# Altium PCB back4_STM32F405.PcbDoc (part 3 of 3)
Units mil, origin at the board's own origin, x right, y up, seen from the top; angles counter-clockwise.
Board outline 3543.31 x 3543.31 mil, 4 copper layers (Top Layer, GND02, PWR03, Bottom Layer), stack 32.024 mil thick; 190 components, 150 nets, 1254 pads, 137 vias.
Unrouted connection lines stored in the file: 499.
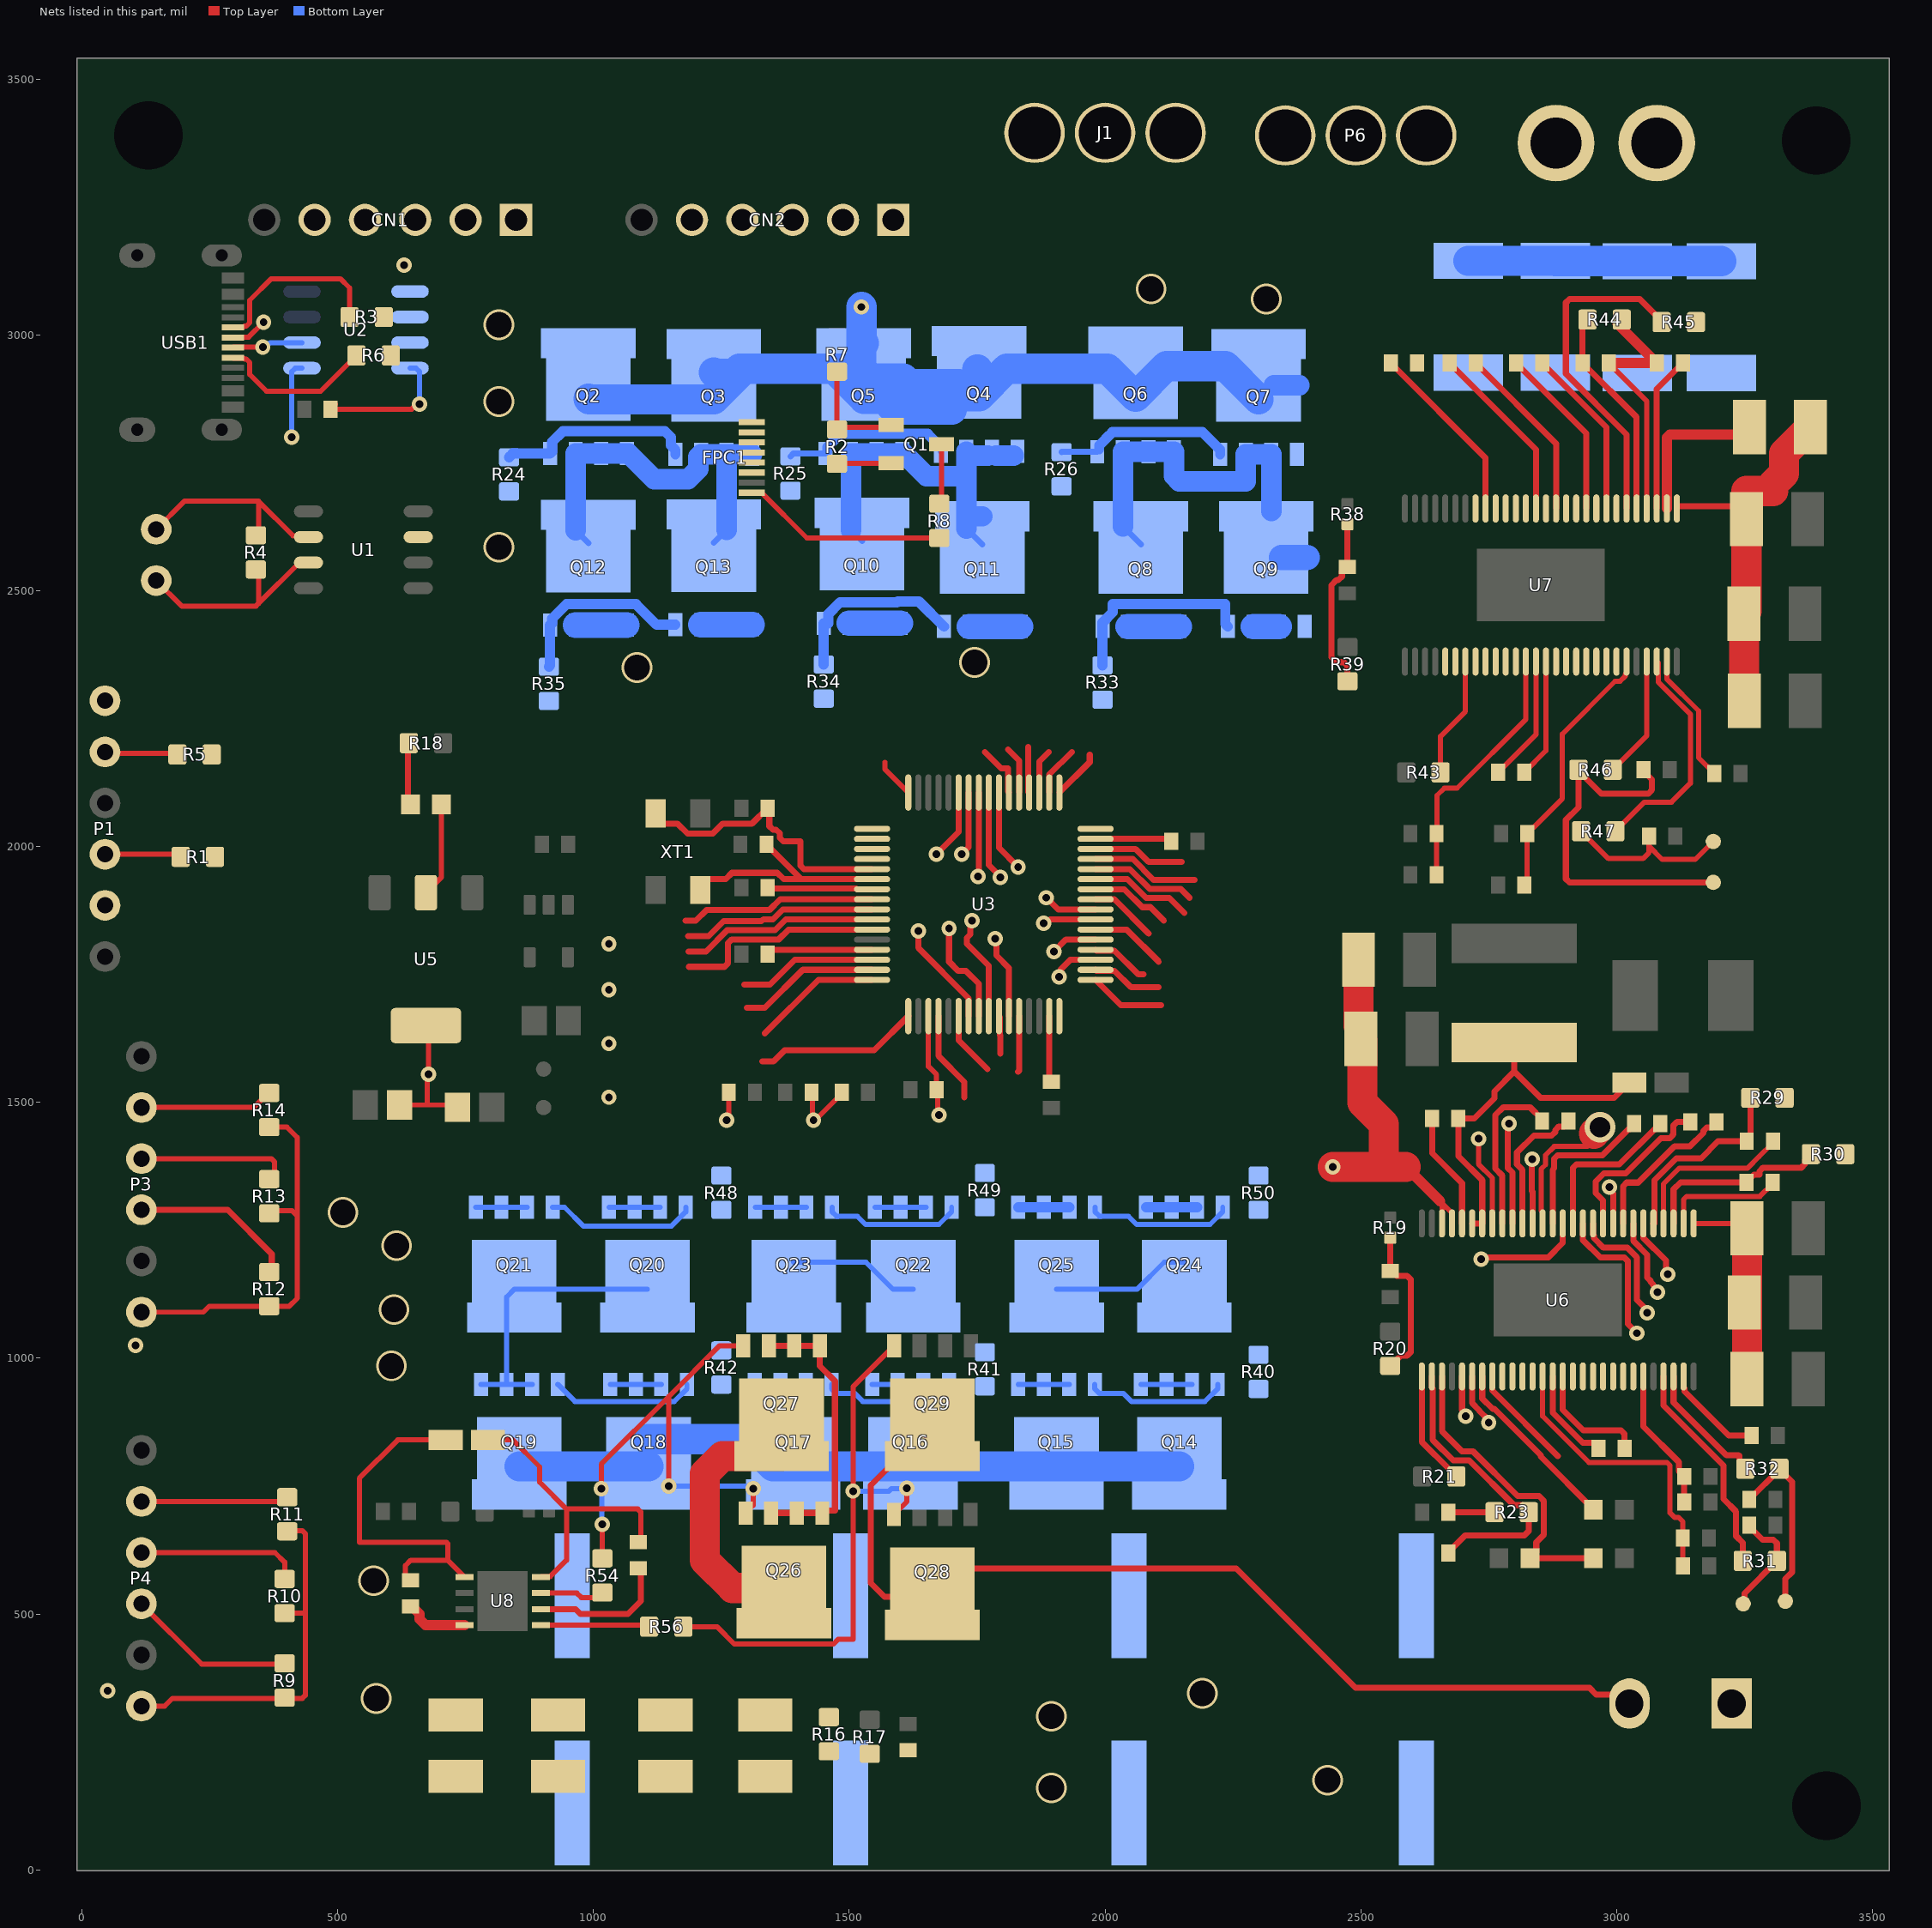
[diagram p4: the nets of this part, all layers, seen from the top]

## Via types
v1: diameter 30, hole 15, Top Layer to Bottom Layer, 76 vias
v2: diameter 27.56, hole 11.81, Top Layer to Bottom Layer, 42 vias
v3: diameter 60, hole 50, Top Layer to Bottom Layer, 18 vias
v4: diameter 60, hole 40, Top Layer to Bottom Layer, 1 vias

## Nets (pads, with @x,y where several pads share a name; then routed paths per layer and width w, separated by ;. In a path a pad name is that pad's centre, name@x,y a point inside that pad or via, vN(x,y) a via of type N, cw(c..) or ccw(c..) an arc to the next point about the centre after c; other vN are vias at no path point) (continued)
DCBUS: C12.1 C13.1 C14.1 C15.1 C16.1 C17.2 C18.2 C19.2 C28.2 C29.2 C42.2 C44.2 C47.2 C49.2 C60.2 C62.2 C65.2 P5.1 Q2.D Q3.D Q4.D Q5.D Q6.D Q7.D Q14.D Q15.D Q16.D Q17.D Q18.D Q19.D Q26.D Q27.D R16.2 U6.29 U6.53 U6.54 U7.29 | length 5779.9
  Top Layer w10: U6.54@2658.53,1263.45 2658.53,1303.15 2678.21,1283.47 U6.53@2678.21,1263.45 ; U6.29@3150.65,1263.45 3245.3,1263.45 C47.2@3254.91,1253.84
  Top Layer w12: U7.29@3118.93,2665.01 3228.93,2665.01 C62.2@3253.93,2640.01
  Top Layer w20: 2587.84,1373.84 2654.67,1307.01
  Top Layer w59.06: Q27.D@1367.48,808.79 Q27.D@1312.36,808.79 ; Q27.D@1367.48,863.91 Q27.D@1312.36,808.79 ; Q26.D@1372.2,537.1 1358.42,550.88 1271.57,550.88 1217.2,605.25 1217.2,774.2 1251.8,808.79 Q27.D@1312.36,808.79 ; v1(2444.91,1373.84) 2544.91,1373.84 ; C29.2@2495.43,1778.84 2495.43,1649.55 2497.51,1647.46 2497.51,1626.5 C28.2@2500.17,1623.84 2502.83,1621.19 2502.83,1499.44 2544.91,1457.36 2544.91,1373.84 ; 2587.84,1373.84 2544.91,1373.84 ; C65.2@3249.45,2285.01 3249.45,2454.49 C60.2@3248.93,2455.01 3253.93,2460.01 C62.2@3253.93,2640.01 3253.93,2695.01 3305.69,2695.01 3305.69,2707.88 3327.16,2729.34 3327.16,2768.24 C49.2@3378.93,2820.01 ; C42.2@3254.91,958.84 3254.91,1103.84 C44.2@3249.91,1108.84 3254.91,1113.84 C47.2@3254.91,1253.84
  Bottom Layer w59.06: Q19.D@855,788.54 Q18.D@1107.66,788.54 ; Q2.D@990,2875.36 991.54,2873.82 Q3.D@1235,2873.82 1285.28,2924.1 1237.87,2924.1 Q3.D@1235,2926.97 ; Q18.D@1107.66,841.69 1297.76,841.69 1350.91,788.54 Q17.D@1390.28,788.54 Q16.D@1619.72,788.54 Q15.D@1905,788.54 Q14.D@2145,788.54 ; Q3.D@1285.28,2934.1 Q5.D@1469.59,2934.1 ; Q5.D@1523.61,2928.51 1523.61,2983.62 Q5.D@1523.78,2983.62 ; v1(1523.78,3054.73) Q5.D@1523.78,2983.62 ; Q5.D@1526.06,2983.62 Q5.D@1523.78,2983.62 ; Q5.D@1528.33,2983.62 Q5.D@1523.78,2983.62 ; Q4.D@1714.41,2904.1 1616.08,2904.1 1605.45,2914.73 1542.11,2914.73 Q5.D@1528.33,2928.51 1522.74,2934.1 Q5.D@1469.59,2934.1 ; Q4.D@1750,2904.1 1750,2932.17 Q4.D@1750.71,2932.88 ; Q7.D@2300,2874.1 2235,2939.1 2120,2939.1 Q6.D@2059.73,2878.82 2004.45,2934.1 1808.15,2934.1 Q4.D@1753.78,2879.73 1714.41,2879.73 1700.63,2865.95 1700.63,2854.04 1589.02,2854.04 1567.7,2875.36 Q5.D@1528.33,2875.36 Q5.D@1469.59,2934.1
  other v3: 570,565 605,985 610,1095 615,1220 510,1285 815,2870 815,3020 2315,3070 2090,3090
EN_GATE_1: U3.33 U6.16 U7.16 | length 149
  Top Layer w11.81: U3.33@1981.44,1739.42 2030.87,1690 2110,1690
FAULT_1: U3.54 U6.6 U7.6 | length 210.5
  Top Layer w11.81: 1765,2185 1797.1,2152.9 1810.28,2152.9 1810.28,2107.44 U3.54@1812.15,2105.56 ; U6.6@2717.58,964.24 2717.58,912.27 2732.03,897.82 2732.03,896.65 2749.91,878.77 v1(2749.91,873.84)
GH_A_2: R24.2 U6.47 | length 200.1
  Top Layer w11.81: v1(2789.91,1458.84) 2787.44,1456.38 2787.44,1371.66 2796.32,1362.77 U6.47@2796.32,1263.45
GH_A_3: R40.2 U7.47
GH_B_2: R25.2 U6.42 | length 211.1
  Top Layer w11.81: v1(2734.91,1193.84) 2737.88,1196.81 2866.47,1196.81 2894.75,1225.09 U6.42@2894.75,1263.45
GH_B_3: R41.2 U7.42
GH_C_2: R26.2 U6.37 | length 73.7
  Top Layer w11.81: v1(2985.95,1334.13) 2985.95,1329.2 2993.17,1321.99 U6.37@2993.17,1263.45
GH_C_3: R42.2 U7.37
GL_A_2: R35.2 U6.45 | length 126.6
  Top Layer w11.81: v1(2834.91,1388.84) 2833.82,1387.76 2833.82,1327.18 2835.69,1325.31 U6.45@2835.69,1263.45
GL_A_3: R50.2 U7.45
GL_B_2: R34.2 U6.40 | length 285.8
  Top Layer w11.81: U6.40@2934.12,1263.45 2934.12,1230.79 2968.1,1196.81 3014.84,1196.81 3021.81,1189.84 3021.81,1066.94 v1(3039.91,1048.84)
GL_B_3: R49.2 U7.40
GL_C_2: R33.2 U6.35 | length 154.2
  Top Layer w11.81: U6.35@3032.54,1263.45 3032.54,1229.48 3059.91,1202.12 3059.91,1157.7 3066.43,1151.18 3066.43,1149.27 3071.43,1144.27 3071.43,1142.25 3079.91,1133.77 v1(3079.91,1128.84)
GL_C_3: R48.2 U7.35
GPIO0_1: SW2.1 U3.28 | length 109.3
  Top Layer w11.81: 1830,1560 1831.83,1561.83 U3.28@1831.83,1668.56
GVDD: C34.2 C35.2 C52.2 C53.2 U6.13 U7.13 | length 1085.1
  Top Layer w10: C53.2@2647.98,1945.01 C52.2@2647.98,2025.01 ; C52.2@2648.93,2025.01 2648.93,2100.01 2663.24,2114.33 2688.24,2114.33 2822.55,2248.63 U7.13@2822.55,2361.57 ; U6.13@2855.38,964.24 2855.38,886.71 2945.98,796.11 3098.68,796.11 3104.54,790.25 3104.54,747.55 3104.54,697.55 3113.03,689.06 3120.83,689.06 3129.32,680.57 C34.2@3129.32,648.84 3129.61,648.55 3129.61,603.55 3124.91,598.85 C35.2@3129.91,593.84
LEDA_1: FPC1.1 R8.1 | length 403.7
  Top Layer w10: FPC1.1@1308.97,2691.63 1309.88,2690.73 1329.56,2690.73 1417.12,2603.17 1583.17,2603.17 R8.1@1676.02,2603.17
M0_AH_1: U3.41 U6.17 | length 131.3
  Top Layer w11.81: U3.41@1981.44,1896.9 2018.1,1896.9 2085,1830
M0_AL_1: U3.34 U6.18 | length 137.7
  Top Layer w11.81: U3.34@1981.44,1759.11 1983.32,1757.24 2018.35,1757.24 2050.58,1725 2105,1725
M0_BH_1: U3.42 U6.19 | length 159.1
  Top Layer w11.81: U3.42@1981.44,1916.59 2037.66,1916.59 2072.68,1881.57 2088.43,1881.57 2115,1855
M0_BL_1: U3.35 U6.20 | length 92.2
  Top Layer w11.81: v1(1910,1745) 1913.48,1748.48 1913.48,1760.04 1932.23,1778.79 U3.35@1981.44,1778.79
M0_CH_1: U3.43 U6.21 | length 201
  Top Layer w11.81: U3.43@1981.44,1936.27 2043.16,1936.27 2080.06,1899.38 2125.62,1899.38 2155,1870
M0_CL_1: U3.36 U6.22 | length 113.6
  Top Layer w11.81: U3.36@1981.44,1798.48 1983.32,1796.6 2018.35,1796.6 2064.95,1750 2075,1750
M0_ENC_A_1: P4.3 R9.1 U3.56 | length 504.3
  Top Layer w10: P4.3@116.12,520 234.19,401.93 394.58,401.93 R9.1@396.12,403.46
  Top Layer w11.81: U3.56@1772.78,2105.56 1772.78,1964.05 1795,1941.82 v1(1795,1940)
M0_ENC_B_1: P4.4 R10.1 U3.57 | length 487.4
  Top Layer w10: P4.4@116.12,620 377.3,620 396.12,601.18 R10.1@396.12,568.46
  Top Layer w11.81: v1@1750,1940 v1(1751.55,1941.55) 1753.1,1943.1 U3.57@1753.1,2105.56
M0_ENC_Z_1: P4.5 R11.1 U3.40 | length 394.4
  Top Layer w10: P4.5@116.12,720 392.65,720 R11.1@401.12,728.46
  Top Layer w11.81: v1(1885,1900) 1885.7,1900 1908.49,1877.22 U3.40@1981.44,1877.22
M0_nCS_1: U3.2 U6.8 | length 208.4
  Top Layer w11.81: U6.8@2756.95,964.24 2756.95,936.8 2884.91,808.84
M0_SO1_1: C45.2 R31.2 TP3.1 U3.8 | length 597.9
  Top Layer w11.81: 1180,1855 1200,1855 1220.73,1875.73 1343.67,1875.73 1364.84,1896.9 U3.8@1544.43,1896.9 ; TP3.1@3247.39,520.01 3249.91,522.53 3249.91,540.38 R31.2@3313.37,603.84 3313.37,638.29 3306.45,645.2 3285,645.2 3259.32,670.89 C45.2@3259.32,673.84
M0_SO2_1: C46.2 R32.2 TP4.1 U3.9 | length 738.1
  Top Layer w11.81: 1185,1825 1224.81,1825 1254.07,1854.26 1328.29,1854.26 1331.95,1857.92 1351.05,1857.92 1370.35,1877.22 U3.9@1544.43,1877.22 ; C46.2@3259.32,723.84 3318.37,782.9 3342.99,758.28 3342.99,581.82 3329.91,568.74 TP4.1@3329.91,525.01
M0_TEMP_1: C25.2 C48.2 R19.1 R20.2 R38.1 R39.2 | length 651.4
  Top Layer w11.81: R39.2@2473.93,2323.08 2473.93,2353.47 2467.01,2360.39 2451.9,2360.39 2442.34,2369.96 2442.34,2510.77 2452.26,2520.7 2456.18,2520.7 2463.1,2527.62 2463.1,2538.32 2470.97,2546.19 C48.2@2473.93,2546.19 R38.1@2473.93,2630.01 ; R20.2@2557.39,985.01 2559.36,985.01 2571.17,996.82 2571.17,998.09 2578.09,1005.01 2590.47,1005.01 2597.39,1011.93 2597.39,1153.68 2590.47,1160.6 2570.34,1160.6 2560.34,1170.6 C25.2@2557.39,1170.6 R19.1@2557.39,1235.33
M0_TEMP（ENC_CS0）_1: CN1.5 U3.25 | length 208.3
  Top Layer w11.81: v1(1740,1855) 1736.52,1851.52 1736.52,1828.33 1730,1821.81 1730,1810 1772.78,1767.22 U3.25@1772.78,1668.56
M1_AH_1: U3.37 U7.17 | length 91
  Top Layer w11.81: v1(1900,1795) 1923.16,1818.16 U3.37@1981.44,1818.16
M1_AL_1: U3.23 U7.18 | length 207.2
  Top Layer w11.81: v1(1635,1835) 1635,1802 1733.41,1703.59 U3.23@1733.41,1668.56
M1_BH_1: U3.38 U7.19 | length 149.6
  Top Layer w11.81: U3.38@1981.44,1837.85 2042.15,1837.85 2105,1775
M1_BL_1: U3.26 U7.20 | length 75
  Top Layer w11.81: U3.26@1792.47,1668.56 1794.34,1666.69 1794.34,1630.99 1795,1630.99 1795,1595
M1_CH_1: U3.39 U7.21 | length 104.6
  Top Layer w11.81: v1(1880,1850) 1884.92,1850 1892.46,1857.54 U3.39@1981.44,1857.54
M1_CL_1: U3.27 U7.22 | length 162.7
  Top Layer w11.81: v1(1785,1820) 1787.37,1817.63 1787.37,1787.28 1812.15,1762.5 U3.27@1812.15,1668.56
M1_ENC_A_1: P3.3 R12.1 U3.58 | length 454
  Top Layer w11.81: P3.3@116.12,1290 284.82,1290 370.92,1203.9 370.92,1173.27 R12.1@366.12,1168.46 ; v1(1720,1985) 1733.41,1998.41 U3.58@1733.41,2105.56
M1_ENC_B_1: P3.4 R13.1 U3.59 | length 439.4
  Top Layer w10: P3.4@116.12,1390 370.26,1390 376.12,1384.14 376.12,1360 R13.1@366.12,1350
  Top Layer w11.81: v1(1670,1985) 1713.73,2028.73 U3.59@1713.73,2105.56
M1_ENC_Z_1: P3.5 R14.1 U3.4 | length 261.8
  Top Layer w10: P3.5@116.12,1490 335.69,1490 364.15,1518.46 R14.1@366.12,1518.46
M1_nCS_1: U3.3 U7.8
M1_SO1_1: C63.2 R46.2 TP5.1 U3.11 | length 1136.3
  Top Layer w11.81: 1186.68,1765 1256.18,1765 1263.09,1771.92 1263.09,1811.62 1263.13,1811.66 1270.11,1818.64 1362.14,1818.64 1381.35,1837.85 U3.11@1544.43,1837.85 ; R46.2@2925.46,2150.01 R46.2@2925.46,2148.04 ; C63.2@3052.75,2150.01 3052.75,2147.06 3068.93,2130.88 3068.93,2110.56 3062.01,2103.64 2969.86,2103.64 R46.2@2925.46,2148.04 ; TP5.1@3188.93,1930.01 2907.76,1930.01 2900.84,1936.93 2900.84,2052.03 2925.46,2076.66 R46.2@2925.46,2148.04
M1_SO2_1: C64.2 R47.2 TP6.1 U3.10 | length 727.5
  Top Layer w10: R47.2@2930.46,2030.01 2984.04,1976.43 3051.49,1976.43 3063.33,1988.28 3063.33,2000.6 ; C64.2@3063.33,2020.01 3063.33,2000.6 ; TP6.1@3188.93,2010.01 3153.93,1975.01 3088.93,1975.01 3063.33,2000.6
  Top Layer w11.81: 1185.22,1795 1220,1795 1261.45,1836.45 1354.76,1836.45 1375.85,1857.53 U3.10@1544.43,1857.53
M1_TEMP（ENC_CS1）_1: CN2.5 U3.20 | length 179.5
  Top Layer w11.81: U3.20@1674.36,1668.56 1674.36,1590.64 1725,1540 1725,1510
NetC1_2: C1.2 U2.8 | length 277.4
  Top Layer w10: C1.2@495.59,2865 C1.2@485.59,2855 644.59,2855 654.59,2865 v1(660,2865)
  Bottom Layer w10: U2.8@641.22,2935 653.12,2935 659.96,2928.16 v1(660,2865) v1(660,2865)
NetC2_1: C2.1 U3.5 XT1.3 | length 563.7
  Top Layer w11.81: XT1.3@1121.69,2064.8 1121.69,2058.78 1135.47,2045 1164.03,2045 1183.69,2025.34 1232.92,2025.34 1252.58,2045 1310,2045 C2.1@1340,2075 1343.64,2071.36 1343.64,2040 1350.56,2033.08 1356.91,2033.08 1364.03,2025.96 1364.03,2017.12 1371.14,2010 1404.45,2010 1404.45,1962.88 1411.37,1955.96 U3.5@1544.43,1955.96
NetC3_1: C3.1 U3.6 XT1.1 | length 461
  Top Layer w11.81: XT1.1@1208.31,1915.2 1208.31,1936.27 1258.34,1936.27 1270.7,1948.64 1359.3,1948.64 1371.66,1936.27 U3.6@1544.43,1936.27 ; C3.1@1338.2,2004.44 1338.2,2003.94 1403.99,1938.15
NetC4_2: C4.2 U3.47 | length 150.5
  Top Layer w11.81: U3.47@1981.44,2015.01 2050.69,2015.01 2051.26,2015.59 2123.82,2015.59 C4.2@2129.41,2010
NetC5_2: C5.2 U3.31 | length 129.7
  Top Layer w11.81: U3.31@1890.89,1668.56 1890.89,1544.7 C5.2@1895,1540.59
NetC11_2: C11.2 U3.13 | length 208.3
  Top Layer w11.81: C11.2@1340,1790 1340,1790.61 1347.87,1798.48 U3.13@1544.43,1798.48
NetC26_1: C26.1 R23.1 | length 90.4
  Top Layer w11.81: C26.1@2671.09,698.84 R23.1@2761.44,698.84
NetC27_1: C27.1 R23.2 U6.2 | length 585.3
  Top Layer w11.81: U6.2@2638.84,964.24 2638.84,942.58 2640.72,940.71 2640.72,840.15 2680.43,800.43 2711.5,800.43 2799.31,712.62 2816.56,712.62 2828.37,700.81 R23.2@2828.37,698.84 2828.37,662.31 2819.91,653.84 2703.96,653.84 2671.09,620.97 C27.1@2671.09,618.84
NetC30_1: C30.1 D2.K L1.1 U6.50 U6.51 | length 715.1
  Top Layer w11.81: U6.51@2717.58,1263.45 U6.50@2737.27,1263.45 2737.27,1348.17 2690.5,1394.95 C30.1@2690.5,1468.84 2721.99,1468.84 2760.95,1507.8 2760.95,1521.34 2799.91,1560.3 ; L1.1@2799.91,1616.99 2799.91,1560.3 ; D2.K@3024.91,1538.84 2994.91,1508.84 2851.36,1508.84 2799.91,1560.3
NetC30_2: C30.2 U6.52 | length 229.7
  Top Layer w11.81: C30.2@2639.32,1468.84 2639.32,1400.85 2697.9,1342.27 U6.52@2697.9,1263.45
NetC32_2: C32.2 U6.48 | length 327.9
  Top Layer w11.81: U6.48@2776.64,1263.45 2776.64,1356.62 2763,1370.26 2763,1474.99 2778.76,1490.75 2830.36,1490.75 2854.32,1466.8 C32.2@2854.32,1463.84
NetC33_2: C33.2 U6.43 | length 314.3
  Top Layer w11.81: U6.43@2875.06,1263.45 2875.06,1368.32 2877.81,1371.07 2877.81,1389.74 2884.73,1396.65 2972.13,1396.65 3023.49,1448.02 3026.44,1448.02 3034.31,1455.89 C33.2@3034.31,1458.84
NetC36_1: C36.1 U6.14 | length 190.6
  Top Layer w11.81: U6.14@2875.06,964.24 2875.06,893.5 2933.89,834.67 2956.44,834.67 2964.32,826.8 C36.1@2964.32,823.84
NetC36_2: C36.2 U6.15 | length 233.6
  Top Layer w11.81: U6.15@2894.75,964.24 2894.75,899 2934.91,858.84 3008.58,858.84 3015.5,851.92 C36.2@3015.5,823.84
NetC37_2: C37.2 U6.38 | length 330.9
  Top Layer w11.81: U6.38@2973.49,1263.45 2973.49,1308.54 2959.05,1322.98 2959.05,1345.27 2974.81,1361.03 3017.5,1361.03 3086.67,1430.2 3104.21,1430.2 3111.18,1437.18 3111.18,1454.72 3118.1,1461.63 C37.2@3143.7,1461.63
NetC38_2: C38.2 R29.2 U6.33 | length 386.2
  Top Layer w11.81: U6.33@3071.91,1263.45 3073.79,1263.45 3073.79,1347.73 3116.81,1390.75 3165.08,1390.75 3198.18,1423.84 C38.2@3254.32,1423.84 3261.44,1430.97 R29.2@3261.44,1508.84
NetC39_1: C39.1 C40.1 U6.23 | length 278.4
  Top Layer w11.81: U6.23@3052.23,964.24 3052.23,866.47 3121.44,797.26 3121.44,779.43 C39.1@3132.03,768.84 C40.1@3132.03,718.84
NetC41_2: C41.2 R30.2 U6.31 | length 372.2
  Top Layer w11.81: U6.31@3111.28,1263.45 3111.28,1330.22 3124.91,1343.84 C41.2@3253.73,1343.84 3268.73,1358.84 3279.22,1358.84 3279.22,1365.51 3286.2,1372.48 3361.18,1372.48 3368.1,1379.4 3368.1,1387.03 R30.2@3379.91,1398.84
NetC43_2: C43.2 U6.27 | length 196.5
  Top Layer w11.81: U6.27@3130.97,964.24 3130.97,942.58 3132.84,940.71 3132.84,935.21 3219.21,848.84 C43.2@3263.73,848.84
NetC50_2: C50.2 U7.48 | length 361.1
  Top Layer w11.81: C50.2@2558.33,2945.01 2743.81,2759.54 U7.48@2743.81,2660.78
NetC51_2: C51.2 U7.43 | length 354.2
  Top Layer w11.81: C51.2@2673.34,2945.01 2842.23,2776.11 U7.43@2842.23,2660.78
NetC54_1: C54.1 U7.14 | length 247.2
  Top Layer w10: C54.1@2768.34,2145.01 2842.23,2218.9 U7.14@2842.23,2361.57
NetC54_2: C54.2 U7.15 | length 234.1
  Top Layer w10: C54.2@2819.52,2145.01 2861.92,2187.41 U7.15@2861.92,2361.57
NetC55_2: C55.2 U7.38 | length 341.1
  Top Layer w11.81: C55.2@2803.34,2945.01 2940.66,2807.69 U7.38@2940.66,2660.78
NetC56_2: C56.2 R44.2 U7.33 | length 417.1
  Top Layer w11.81: R44.2@2943.07,3030 2933.34,3020.26 C56.2@2933.34,2945.01 3039.08,2839.26 U7.33@3039.08,2660.78
NetC57_1: C57.1 C58.1 U7.23 | length 526.8
  Top Layer w10: C58.1@2819.52,1925.01 2825.11,1930.6 2825.11,2027.96 2833.89,2036.74 2836.84,2036.74 2893.93,2093.83 2893.93,2220.01 2996.93,2323.01 3006.72,2323.01 3016.62,2332.91 3016.62,2336.65 3019.4,2339.43 U7.23@3019.4,2361.57
NetC59_2: C59.2 R45.2 U7.31 | length 305.4
  Top Layer w11.81: U7.31@3078.45,2660.78 3078.45,2893.95 C59.2@3129.51,2945.01
NetC61_2: C61.2 U7.27 | length 256.9
  Top Layer w10: U7.27@3098.14,2361.57 3098.14,2327.44 3160.3,2265.28 3160.3,2173.68 C61.2@3190.86,2143.12
NetC67_1: C67.1 Q26.S Q27.S Q28.D Q29.D U8.6 U9.2 | length 2830.5
  Top Layer w11.81: U8.6@896.81,509.5 965.25,509.5 974.5,500.25 1067.2,500.25 1092.2,525.25 1092.2,584.66 C67.1@1087.2,589.66 ; Q27.S@1342.48,1024.34 Q27.S@1392.48,1024.34 Q27.S@1442.48,1024.34 1442.48,984.88 1471.9,955.46 1471.9,702.25 1442.48,702.25 Q26.S@1447.2,697.53 Q26.S@1397.2,697.53 Q26.S@1347.2,697.53 ; Q29.D@1662.48,863.91 1607.36,808.79 1599.49,808.79 1542.2,751.51 1542.2,560.25 1568.54,533.91 Q28.D@1662.2,533.91 1717.41,589.12 2256.27,589.12 2489.53,355.86 2947.01,355.86 2960.22,342.65 3007.35,342.65 U9.2@3025,325
NetC67_2: C67.2 D3.K U8.8 | length 599
  Top Layer w10: D3.K@793.54,840.25 842.01,840.25 894.6,787.65 894.6,757.85 947.2,705.25 ; U8.8@896.81,572.49 897.71,573.4 915.35,573.4 947.2,605.25 947.2,705.25 ; C67.2@1087.2,640.84 1092.2,645.84 1092.2,699.39 1086.34,705.25 947.2,705.25
NetD1_K: D1.K R18.2 | length 122.6
  Top Layer w11.81: R18.2@638.93,2202.14 637.39,2200.6 637.39,2086.82 D1.K@642.08,2082.14
NetP1_3: P1.3 R1.1 | length 150.1
  Top Layer w10: P1.3@45,1985 188.07,1985 R1.1@193.07,1980
NetP1_5: P1.5 R5.1 | length 143.6
  Top Layer w10: P1.5@45,2185 48.07,2181.93 184.6,2181.93 R5.1@186.53,2180
NetP2_1: P2.1 R4.2 U1.7 | length 422.2
  Top Layer w10: P2.1@145,2520 195,2470 340,2470 345,2475 ; R4.2@340,2541.54 345,2536.54 345,2475 ; U1.7@442.72,2555 425,2555 345,2475
NetP2_2: P2.2 R4.1 U1.6 | length 418.1
  Top Layer w10: P2.2@145,2620 200,2675 345,2675 ; R4.1@340,2608.46 345,2613.46 345,2675 ; U1.6@442.72,2605 440.11,2607.61 412.39,2607.61 345,2675
NetQ1_1: Q1.1 R2.1 R7.2 | length 222.6
  Top Layer w10: R7.2@1476.02,2928.17 R2.1@1476.03,2815.1 1480.5,2819.56 1577.34,2819.56 Q1.1@1581.81,2824.03
NetQ1_3: Q1.3 R8.2 | length 118.3
  Top Layer w10: R8.2@1676.02,2670.1 1680.24,2674.31 Q1.3@1680.24,2786.63
NetQ2_G: Q2.G Q3.G R24.1 | length 390.2
  Bottom Layer w20: R24.1@835,2761.03 842.05,2768.07 Q2.G@915,2768.07 918.78,2771.85 918.78,2790.65 939.86,2811.73 1139.58,2811.73 1151.3,2800.01 1151.3,2784.1 1160,2775.39 Q3.G@1160,2766.54
NetQ4_G: Q4.G Q5.G R25.1 | length 345.2
  Bottom Layer w11.81: Q5.G@1458.61,2773.35 Q5.G@1453.33,2768.07 R25.1@1390.51,2768.07 ; Q4.G@1670.91,2789.17 1678.78,2781.3 Q4.G@1678.78,2772.44 ; R25.1@1390.51,2768.07 R25.1@1385,2762.56 R25.1@1390.51,2768.07
  Bottom Layer w20: Q5.G@1457.11,2773.35 1457.11,2780.71 1471.26,2794.85 1471.26,2795.04 1482.93,2806.71 1653.37,2806.71 Q4.G@1670.91,2789.17
NetQ6_G: Q6.G Q7.G R26.1 | length 355.3
  Bottom Layer w11.81: R26.1@1915,2771.03 1915.51,2771.54 Q6.G@1984.73,2771.54 Q6.G@1990,2776.81
  Bottom Layer w20: Q6.G@1988.51,2776.81 1988.51,2784.17 2002.65,2798.32 2002.65,2798.5 2014.32,2810.17 2190.5,2810.17 2225,2775.67 Q7.G@2225,2766.81
NetQ8_G: Q8.G Q9.G R33.1 | length 394.3
  Bottom Layer w20: R33.1@1995,2354.1 Q8.G@1995,2430 1995,2437.98 2015.22,2458.2 2015.22,2474.1 2235,2474.1 2235,2435 Q9.G@2240,2430
NetQ10_G: Q10.G Q11.G R34.1 | length 364
  Bottom Layer w20: R34.1@1450,2356.03 Q10.G@1450,2436.54 1459,2436.54 1459,2454.58 1481.96,2477.54 1593.44,2477.54 1595,2479.1 1635.9,2479.1 Q11.G@1685,2430
NetQ12_G: Q12.G Q13.G R35.1 | length 365.9
  Bottom Layer w20: R35.1@912.79,2351.59 915,2353.8 Q12.G@915,2432.69 918.78,2436.47 918.78,2445.33 932.92,2459.47 932.92,2459.65 946.95,2473.69 1083.04,2473.69 1123.19,2433.54 Q13.G@1160,2433.54
NetQ14_G: Q14.G Q15.G R40.1 | length 278.2
  Bottom Layer w10: Q15.G@1980,948.98 1980,940.12 1988.78,931.34 2035.66,931.34 2051.66,915.34 2195.22,915.34 2220,940.12 Q14.G@2220,948.98
NetQ16_G: Q16.G Q17.G R41.1 | length 267.7
  Bottom Layer w10: Q17.G@1465.28,948.97 1465.28,940.12 1474.06,931.34 1510.39,931.34 1526.39,915.34 1669.94,915.34 1694.72,940.12 Q16.G@1694.72,948.97
NetQ18_G: Q18.G Q19.G R42.1 | length 285.7
  Bottom Layer w10: Q19.G@930,948.98 963.64,915.34 1157.88,915.34 1182.66,940.12 Q18.G@1182.66,948.97
NetQ20_G: Q20.G Q21.G R48.1 | length 295.8
  Bottom Layer w10: Q21.G@920,1295 943.35,1295 980,1258.35 1152.48,1258.35 1180.27,1286.14 Q20.G@1180.27,1295
NetQ22_G: Q22.G Q23.G R49.1 | length 272
  Bottom Layer w10: Q23.G@1466.22,1295 1466.22,1286.14 1475,1277.36 1515.66,1277.36 1531.66,1261.36 1675.22,1261.36 1700,1286.14 Q22.G@1700,1295
NetQ24_G: Q24.G Q25.G R50.1 | length 288
  Bottom Layer w10: Q25.G@1980.27,1295 1980.27,1286.14 1989.05,1277.36 2045.66,1277.36 2061.66,1261.36 2205.22,1261.36 2230,1286.14 Q24.G@2230,1295
NetQ26_G: Q26.G Q27.G R54.1 | length 954.5
  Top Layer w10: v1(1015,745) 1015,793.05 1147.2,925.25 ; R54.1@1017.2,608.71 v1(1017.2,675.25) ; v1(1147.2,750.25) 1147.2,925.25 ; Q27.G@1292.48,1024.34 1246.3,1024.34 1147.2,925.25 ; Q26.G@1297.2,697.53 1312.2,712.53 v1(1312.2,745.25)
  Bottom Layer w10: v1(1015,745) 1016.1,743.9 1016.1,676.35 v1(1017.2,675.25) ; v1(1147.2,750.25) 1307.2,750.25 v1(1312.2,745.25)
NetQ28_G: Q28.G Q29.G R56.1 | length 1125.5
  Top Layer w10: R56.1@1175.67,475.25 1241.33,475.25 1275.13,441.45 1469.28,441.45 1478.07,450.25 1507.2,450.25 v1(1507.2,740.25) 1507.2,944.07 Q29.G@1587.48,1024.34 ; Q28.G@1587.2,694.34 1612.42,719.56 v1(1612.42,745.47)
  Bottom Layer w10: v1(1507.2,740.25) 1577.42,740.25 1582.42,745.25 1612.2,745.25 v1(1612.42,745.47)
NetR3_1: R3.1 USB1.5 | length 357.6
  Top Layer w10: USB1.5@295,3014.68 295.91,3015.59 315.64,3015.59 317.51,3017.45 321.21,3017.45 327.65,3023.9 327.65,3067.65 370,3110 505,3110 523.07,3091.93 R3.1@523.07,3035
NetR6_1: R6.1 USB1.8 | length 311.4
  Top Layer w10: USB1.8@295,2955.63 295.91,2954.72 315.63,2954.72 317.51,2952.85 321.21,2952.85 327.65,2946.4 327.65,2922.98 360.63,2890 466.54,2890 R6.1@536.54,2960
NetR21_1: R21.1 U6.1 | length 224.6
  Top Layer w11.81: U6.1@2619.16,964.24 2619.16,836.52 2673.06,782.62 2675.03,782.62 2686.84,770.81 R21.1@2686.84,768.84
NetR22_1: R22.1 R27.2 U6.3 | length 610.4
  Top Layer w11.81: U6.3@2658.53,964.24 2658.53,857.17 2697.45,818.24 2718.87,818.24 2806.68,730.43 2848.43,730.43 2857.99,720.87 2857.99,655.4 2842.94,640.34 2842.94,621.24 R22.1@2830.54,608.84 R27.2@2954.59,608.84
NetR28_1: R28.1 U6.7 | length 352.4
  Top Layer w11.81: U6.7@2737.27,964.24 2737.27,921.17 2757.69,900.75 2761.05,900.75 2851.62,810.18 2851.62,807.8 2954.59,704.83 R28.1@2954.59,703.84
NetR31_1: R31.1 U6.25 | length 424.5
  Top Layer w11.81: U6.25@3091.6,964.24 3091.6,907.8 3208.9,790.51 3208.9,724.74 3233.63,700.01 3233.63,652.18 3246.44,639.37 R31.1@3246.44,603.84
NetR32_1: R32.1 U6.26 | length 252.6
  Top Layer w11.81: U6.26@3111.28,964.24 3111.28,913.31 3214.47,810.12 3238.63,810.12 3239.63,809.12 3239.63,795.65 R32.1@3251.44,783.84
NetR43_1: R43.1 U7.7 | length 236.7
  Top Layer w10: R43.1@2655.85,2145.01 2655.85,2215.4 2704.44,2263.99 U7.7@2704.44,2361.57
NetR46_1: R46.1 U7.25 | length 239.1
  Top Layer w10: R46.1@2992.39,2150.01 3058.77,2216.39 U7.25@3058.77,2361.57
NetR47_1: R47.1 U7.26 | length 450.8
  Top Layer w10: R47.1@2997.39,2030.01 3054.12,2086.74 3107.31,2086.74 3144.3,2123.72 3144.3,2258.65 3081.23,2321.72 3081.23,2358.79 U7.26@3078.45,2361.57
NetR54_2: R54.2 U8.7 | length 128
  Top Layer w10: U8.7@896.81,541 967.25,541 976.08,532.17 1007.59,532.17 R54.2@1017.2,541.78
NetR56_2: R56.2 U8.5 | length 213.1
  Top Layer w10: U8.5@896.81,478 1105.98,478 R56.2@1108.74,475.25
NetU2_1: U2.1 USB1.6 | length 223.4
  Top Layer w10: USB1.6@295,2995 295.91,2995.91 325.91,2995.91 v1(355,3025)
  Bottom Layer w10: v1(410,2800) 410,2928.16 416.84,2935 U2.1@430,2935
NetU2_2: U2.2 USB1.7 | length 139
  Top Layer w10: USB1.7@295,2975.31 295.69,2976 v1(353.4,2976)
  Bottom Layer w10: v1(353.4,2976) 358.81,2976 367.81,2985 U2.2@430,2985
NetU6_12: U6.12
NetU7_12: U7.12
nRST_1: C6.2 P1.6 U3.7 | length 205.3
  Top Layer w11.81: C6.2@1340.59,1920 1342.77,1917.82 1513.68,1917.82 1514.91,1916.59 U3.7@1544.43,1916.59
OCTW_1: U6.5 U7.5 | length 80.5
  Top Layer w11.81: U6.5@2697.9,964.24 2697.9,898.82 2705.12,891.6 v1(2705.12,886.68)
PGND: C12.2 C13.2 C14.2 C15.2 C16.2 C17.1 C18.1 C19.1 C38.1 C41.1 C49.1 C56.1 C59.1 C68.1 P5.2 Q12.S Q13.S Q24.S Q25.S R36.1 R37.1 R44.1 R51.1 R52.1 U6.30 U6.32 U6.44 U7.30 U7.32 U7.44 U8.4 U9.1 | length 2687.1
  Top Layer w10: U6.44@2855.38,1263.45 2855.38,1285.59 2852.6,1288.37 2852.6,1369.77 2860.91,1378.07 2860.91,1396.87 2877.88,1413.84 2943.13,1413.84 v4@2957.69,1428.4 ; C56.1@2984.52,2945.01 3058.77,2870.76 U7.32@3058.77,2660.78 ; U6.32@3091.6,1263.45 3091.6,1340.54 3122.64,1371.58 3256.18,1371.58 3278.45,1393.84 3305.5,1420.89 C38.1@3305.5,1423.84 ; U6.30@3130.97,1263.45 3130.97,1310.25 3136.83,1316.11 3280.13,1316.11 3304.91,1340.89 C41.1@3304.91,1343.84
  Top Layer w20: C68.1@642.2,514.66 645.16,514.66 660.09,499.72 660.09,489.72 671.81,478 U8.4@747.59,478 ; C56.1@2984.52,2945.01 C59.1@3078.33,2945.01 3001.67,3021.67 R44.1@3010,3030 ; U7.30@3098.14,2660.78 3098.14,2799.22 3103.93,2805.01 3244.45,2805.01 C49.1@3259.45,2820.01
  Top Layer w59.06: v4@2955.82,1438.94 2955.82,1439.61 v4(2967.48,1451.27)
  Bottom Layer w20: Q25.S@1830.27,1295 Q25.S@1880.27,1295 Q25.S@1930.27,1295 ; Q24.S@2080,1295 Q24.S@2130,1295 Q24.S@2180,1295
  Bottom Layer w50: Q12.S@965,2432.69 Q12.S@1015,2432.69 Q12.S@1065,2432.69 ; Q13.S@1210,2433.54 Q13.S@1260,2433.54 Q13.S@1310,2433.54
  Bottom Layer w59.06: R37.1@2710,3145 R36.1@2880,3145 2880.44,3144.56 3203.95,3144.56 R52.1@3204.39,3144.13
  other v3: 1895,160 2435,175 1895,300 575,335 2190,345 1085,2350 1745,2360 815,2585
RXD_1: U2.7 U3.15 | length 275.1
  Top Layer w11.81: 1300,1685 1335,1685 1409.11,1759.11 U3.15@1544.43,1759.11
SH_A_2: C32.1 J1.1 Q2.S Q3.S Q12.D Q13.D U6.46 | length 1040.8
  Top Layer w11.81: U6.46@2816.01,1263.45 2816.01,1368.28 2805.25,1379.03 2805.25,1402.29 2838.17,1435.21 2873.03,1435.21 2880,1442.18 2880,1446.1 2886.92,1453.02 2897.62,1453.02 2905.5,1460.89 C32.1@2905.5,1463.84
  Bottom Layer w11.81: Q12.D@965,2618.12 Q12.D@990,2593.12 ; Q3.S@1204.79,2761.33 Q3.S@1210,2766.54 ; Q13.D@1235,2593.98 Q13.D@1260,2618.98
  Bottom Layer w40: Q12.D@965,2618.12 Q2.S@965,2768.07 Q2.S@1015,2768.07 1068.58,2768.07 1118.76,2717.9 1184.55,2717.9 1204.79,2738.14 Q3.S@1204.79,2761.33 ; Q3.S@1210,2766.54 Q3.S@1260,2766.54 ; Q13.D@1260,2618.98 Q3.S@1260,2766.54 ; Q3.S@1310,2766.54 Q3.S@1260,2766.54
SH_A_3: C50.1 P6.1 Q14.S Q15.S Q24.D Q25.D U7.46 | length 471.7
  Bottom Layer w10: Q15.S@1830,948.98 Q15.S@1880,948.98 Q15.S@1930,948.98 ; Q25.D@1905.27,1134.57 2062.48,1134.57 2115.63,1187.72 Q24.D@2155,1187.72 ; Q14.S@2070,948.98 Q14.S@2120,948.98 Q14.S@2170,948.98
SH_B_2: C33.1 J1.2 Q4.S Q5.S Q10.D Q11.D U6.41 | length 1081.2
  Top Layer w11.81: U6.41@2914.43,1263.45 2914.43,1371.92 2921.35,1378.84 3005.5,1378.84 3074.67,1448.02 3077.62,1448.02 3085.5,1455.89 C33.1@3085.5,1458.84
  Bottom Layer w11.81: Q10.D@1503.33,2618.64 Q10.D@1525,2596.97 ; Q11.D@1728.78,2621.65 Q11.D@1760,2590.43 ; Q4.S@1728.78,2772.44 1728.78,2772.05 Q4.S@1736.65,2764.17 ; Q4.S@1770.91,2764.17 Q4.S@1778.78,2772.05 ; Q4.S@1778.78,2772.44 Q4.S@1778.78,2772.05 ; Q4.S@1786.65,2764.17 Q4.S@1778.78,2772.05 ; Q4.S@1820.91,2764.17 1828.78,2772.05 Q4.S@1828.78,2772.44
  Bottom Layer w40: Q10.D@1503.33,2618.64 Q5.S@1503.33,2768.07 Q5.S@1553.33,2768.07 1606.92,2768.07 1651.18,2723.8 1728.49,2723.8 1728.78,2724.1 ; Q11.D@1728.78,2621.65 Q11.D@1728.78,2645.55 ; Q4.S@1728.78,2772.05 1728.78,2724.1 ; Q4.S@1736.65,2764.17 Q4.S@1770.91,2764.17 ; Q11.D@1760,2645.55 Q11.D@1728.78,2645.55 ; Q4.S@1786.65,2764.17 Q4.S@1820.91,2764.17 ; Q11.D@1728.78,2645.55 1728.78,2724.1
SH_B_3: C51.1 P6.2 Q16.S Q17.S Q22.D Q23.D U7.41 | length 805.1
  Top Layer w11.81: C51.1@2724.52,2945.01 2881.6,2787.92 U7.41@2881.6,2660.78
  Bottom Layer w10: Q17.S@1315.28,948.97 Q17.S@1365.28,948.97 Q17.S@1415.28,948.97 ; Q23.D@1391.22,1187.72 1532.48,1187.72 1585.63,1134.57 Q22.D@1625,1134.57 ; Q16.S@1544.72,948.97 Q16.S@1594.72,948.97 Q16.S@1644.72,948.97
SH_C_2: C37.1 J1.3 Q6.S Q7.S Q8.D Q9.D U6.36 | length 1076.3
  Top Layer w11.81: U6.36@3012.86,1263.45 3012.86,1336.3 3019.78,1343.22 3042.41,1343.22 3113.03,1413.84 3143.26,1413.84 3169.39,1439.97 3169.39,1443.89 3176.3,1450.81 3187.01,1450.81 3194.88,1458.68 C37.1@3194.88,1461.63
  Bottom Layer w11.81: Q8.D@2034.73,2625.71 Q8.D@2070,2590.43 ; Q9.D@2315,2645.55 Q9.D@2325,2655.55
  Bottom Layer w40: Q8.D@2034.73,2625.71 Q6.S@2034.73,2771.54 Q6.S@2084.73,2771.54 Q6.S@2134.73,2771.54 2134.73,2724.37 2145,2714.1 2275,2714.1 Q7.S@2275,2766.81 Q7.S@2325,2766.81 Q9.D@2325,2655.55 ; 2330,2901.81 2380,2901.81
SH_C_3: C55.1 P6.3 Q18.S Q19.S Q20.D Q21.D U7.36 | length 988.3
  Top Layer w11.81: C55.1@2854.52,2945.01 2980.03,2819.5 U7.36@2980.03,2660.78
  Bottom Layer w10: Q19.S@780,948.98 Q19.S@830,948.98 ; Q19.S@880,948.98 Q19.S@830,948.98 ; Q18.S@1032.66,948.97 Q18.S@1082.66,948.97 Q18.S@1132.66,948.97 ; Q20.D@1105.27,1134.57 Q21.D@845,1134.57 830,1119.57 Q19.S@830,948.98
SL_B_2: Q10.S Q11.S R29.1 R37.2 U6.39 | length 445.9
  Top Layer w11.81: U6.39@2953.8,1263.45 2953.8,1241.8 2955.68,1239.92 2955.68,1234.42 2974.28,1215.82 3021.02,1215.82 3039.62,1197.22 3039.62,1114.05 3059.91,1093.77 v1(3059.91,1088.84)
  Bottom Layer w50: Q10.S@1500,2436.54 Q10.S@1550,2436.54 Q10.S@1600,2436.54 ; Q11.S@1735,2430 Q11.S@1785,2430 Q11.S@1835,2430
SL_B_3: Q22.S Q23.S R52.2 U7.39 | length 200
  Bottom Layer w10: Q23.S@1316.22,1295 Q23.S@1366.22,1295 Q23.S@1416.22,1295 ; Q22.S@1550,1295 Q22.S@1600,1295 Q22.S@1650,1295
SL_C_2: Q8.S Q9.S R30.1 R36.2 U6.34 | length 319.4
  Top Layer w11.81: U6.34@3052.23,1263.45 3052.23,1234.98 3096.43,1190.79 3096.43,1167.32 v1(3099.91,1163.84)
  Bottom Layer w50: Q8.S@2045,2430 Q8.S@2095,2430 Q8.S@2145,2430 ; Q9.S@2290,2430 Q9.S@2340,2430 ; 2345,2565 2395,2565
SL_C_3: Q20.S Q21.S R45.1 R51.2 U7.34 | length 861.4
  Top Layer w12: U7.34@3019.4,2660.78 3019.4,2805.45 2900.75,2924.1 2900.75,3062.97 2907.78,3070 3045.04,3070 3088.07,3026.97 R45.1@3088.07,3025
  Bottom Layer w10: Q21.S@770,1295 Q21.S@820,1295 Q21.S@870,1295 ; Q20.S@1030.27,1295 Q20.S@1080.27,1295 Q20.S@1130.27,1295
SPI_MISO_1: CN1.3 CN2.3 U3.52 U6.9 U7.9 | length 90.1
  Top Layer w11.81: 1850,2195 1850,2107.08 U3.52@1851.52,2105.56
SPI_MOSI_1: CN1.2 CN2.2 U3.53 U6.10 U7.10 | length 93.5
  Top Layer w11.81: 1810,2190 1831.84,2168.16 U3.53@1831.84,2105.56
SPI_SCK_1: CN1.4 CN2.4 U3.51 U6.11 U7.11 | length 87.2
  Top Layer w11.81: U3.51@1871.21,2105.56 1871.21,2166.21 1890,2185
SRC_CS_1: FPC1.8 U3.55 | length 161.1
  Top Layer w11.81: U3.55@1792.46,2105.56 1792.46,1997.54 v1(1830,1960)
SRC_RES_1: FPC1.3 U3.24 | length 204.3
  Top Layer w11.81: v1(1695,1840) 1695,1775 1713.29,1756.71 1728.29,1756.71 1753.1,1731.9 U3.24@1753.1,1668.56
SRC_RS_1: FPC1.4 U3.50 | length 97.7
  Top Layer w11.81: U3.50@1890.89,2105.57 1890.89,2140.89 1935,2185
SRC_SCL_1: FPC1.6 U3.17 | length 322
  Top Layer w11.81: 1330,1580 1351.95,1580 1373.85,1601.91 1548.65,1601.91 U3.17@1615.3,1668.56
SRC_SDA_1: FPC1.5 U3.16 | length 252.7
  Top Layer w11.81: 1335,1635 1439.42,1739.42 U3.16@1544.43,1739.42
SWCLK_1: R1.2 U3.49 | length 99
  Top Layer w11.81: U3.49@1910.58,2105.57 1970,2164.99 1970,2180
SWDIO_1: R5.2 U3.46 | length 179
  Top Layer w11.81: U3.46@1981.44,1995.33 2059.67,1995.33 2085,1970 2150,1970
TXD_1: U2.6 U3.14 | length 269.6
  Top Layer w11.81: 1295,1730 1345,1730 1393.79,1778.79 U3.14@1544.43,1778.79
USB_DM_1: R6.2 U3.44 | length 206.7
  Top Layer w11.81: U3.44@1981.44,1955.96 2048.66,1955.96 2087.43,1917.19 2147.81,1917.19 2165,1900
USB_DP_1: R3.2 U3.45 | length 210.1
  Top Layer w11.81: U3.45@1981.44,1975.64 2054.17,1975.64 2094.81,1935 2174.72,1935
VBUS_S_1: C20.2 R16.1 R17.2 U3.22 | length 126.9
  Top Layer w11.81: U3.22@1713.73,1668.56 1713.73,1621.27 1770,1565
VCC: C7.2 C8.2 C9.2 C10.2 C22.2 C23.2 C68.2 CN1.1 CN2.1 D1.A D3.A FPC1.7 P1.2 P3.1 P4.1 Q1.2 R2.2 R9.2 R10.2 R11.2 R12.2 R13.2 R14.2 R15.2 U1.3 U2.5 U3.1 U3.19 U3.32 U3.48 U3.64 U5.2 U5.4 U6.49 U7.49 U8.1 | length 3391.2
  Top Layer w10: P4.1@116.12,320 161.82,320 176.82,335 394.58,335 R9.2@396.12,336.54 397.65,335 430.56,335 436.42,340.86 436.42,501.54 ; P3.1@116.12,1090 237.27,1090 248.81,1101.54 R12.2@366.12,1101.54 405.26,1101.54 420.78,1117.06 420.78,1278.09 ; R13.2@366.12,1283.07 371.12,1288.07 410.8,1288.07 420.78,1278.09 ; R14.2@366.12,1451.54 400.8,1451.54 420.78,1431.56 420.78,1278.09 ; R10.2@396.12,501.54 436.42,501.54 ; R11.2@401.12,661.54 402.65,663.07 430.56,663.07 436.42,657.21 436.42,501.54 ; C23.2@620.85,1495.01 674.89,1495.01 ; C68.2@642.2,565.84 640.98,565.84 632.2,574.62 632.2,594.62 642.83,605.25 714.84,605.25 ; U5.4@672.39,1650.09 677.39,1645.09 v1(677.39,1555.01) 674.89,1552.51 674.89,1495.01 ; U5.2@672.39,1909.93 702.71,1940.25 D1.A@702.71,2082.14 ; D3.A@710.86,840.25 617.2,840.25 542.2,765.25 542.2,640.25 712.2,640.25 714.84,637.61 714.84,605.25 ; C22.2@733.93,1490.01 728.93,1495.01 674.89,1495.01 ; U8.1@747.59,572.49 714.84,605.25 ; v1(1260,1465) 1264.41,1469.41 C7.2@1264.41,1520 ; C10.2@1426.18,1520 1428.09,1518.09 1428.09,1466.91 v1(1430,1465) 1432.95,1465 1485,1517.05 C9.2@1485,1520 ; R2.2@1476.03,2748.17 1476.56,2748.7 1581.28,2748.7 Q1.2@1581.81,2749.23 ; 1570,2165 1570,2150.86 U3.64@1615.3,2105.56 ; U3.19@1654.67,1668.56 1654.67,1570.33 1670.59,1554.41 C8.2@1670.59,1525 1672.8,1522.8 1672.8,1477.2 v1(1675,1475) ; v1(2729.91,1428.84) 2729.91,1379.44 2756.95,1352.4 U6.49@2756.95,1263.45
  other v1: 50,350 105,1025 1030,1510 1030,1615 1030,1720 1030,1810 629.55,3136.76
pads on no net: H1.1 H2.1 H3.1 H4.1 Q2.7 Q2.9 Q2.10 Q2.11 Q3.7 Q3.9 Q3.10 Q3.11 Q4.7 Q4.9 Q4.10 Q4.11 Q5.7 Q5.9 Q5.10 Q5.11 Q6.7 Q6.9 Q6.10 Q6.11 Q7.7 Q7.9 Q7.10 Q7.11 Q8.7 Q8.9 Q8.10 Q8.11 Q9.7 Q9.9 Q9.10 Q9.11 Q10.7 Q10.9 Q10.10 Q10.11 Q11.7 Q11.9 Q11.10 Q11.11 Q12.7 Q12.9 Q12.10 Q12.11 Q13.7 Q13.9 Q13.10 Q13.11 Q14.7 Q14.9 Q14.10 Q14.11 Q15.7 Q15.9 Q15.10 Q15.11 Q16.7 Q16.9 Q16.10 Q16.11 Q17.7 Q17.9 Q17.10 Q17.11 Q18.7 Q18.9 Q18.10 Q18.11 Q19.7 Q19.9 Q19.10 Q19.11 Q20.7 Q20.9 Q20.10 Q20.11 Q21.7 Q21.9 Q21.10 Q21.11 Q22.7 Q22.9 Q22.10 Q22.11 Q23.7 Q23.9 Q23.10 Q23.11 Q24.7 Q24.9 Q24.10 Q24.11 Q25.7 Q25.9 Q25.10 Q25.11 Q26.7 Q26.9 Q26.10 Q26.11 Q27.7 Q27.9 Q27.10 Q27.11 Q28.7 Q28.9 Q28.10 Q28.11 Q29.7 Q29.9 Q29.10 Q29.11 R1.0 R2.0 R3.0 R4.0 R5.0 R6.0 R7.0 R8.0 R9.0 R10.0 R11.0 R12.0 R13.0 R14.0 R15.0 R16.0 R17.0 R18.0 R19.0 R20.0 R21.0 R23.0 R24.0 R25.0 R26.0 R29.0 R30.0 R31.0 R32.0 R33.0 R34.0 R35.0 R38.0 R39.0 R40.0 R41.0 R42.0 R43.0 R44.0 R45.0 R46.0 R47.0 R48.0 R49.0 R50.0 R53.0 R54.0 R55.0 R56.0 U1.5 U1.8 U2.4 U4.0 U5.0 U6.4 U6.55 U6.56 U7.1 U7.2 U7.3 U7.4 U7.50 U7.51 U7.52 U7.53 U7.54 U7.56 USB1.2 USB1.3 USB1.4 USB1.9 USB1.10 USB1.11
copper on no net:
  other v3: 2505,3150

## Polygon pours and split planes (outlines as drawn)
AGND on GND02 (split plane): 3513.21,18.06 10.1,18.06 10.1,3521.18 3513.21,3521.18
PGND on GND02 (split plane): 3364.9,3217.89 3364.9,3087.11 3347.89,3070.1 2450,3070.1 2448.05,3069.71 2446.4,3068.6 2406.4,3028.6 2405.29,3026.95 2404.9,3025 2404.9,2310 2404.9,2277.11 2381.4,2253.6 2380.29,2251.95 2379.9,2250 2379.9,1047.11 2331.4,998.6 2330.29,996.95 2329.9,995 2329.9,405 2330.29,403.05 2331.4,401.4 2411.4,321.4 2413.05,320.29 2415,319.9 2650,319.9 2651.95,320.29 2653.6,321.4 2782.11,449.9 3307.89,449.9 3324.9,432.89 3324.9,327.11 3177.89,180.1 3090,180.1 3088.05,179.71 3086.4,178.6 3006.4,98.6 3005.29,96.95 3004.9,95 3004.9,67.11 2987.89,50.1 682.11,50.1 515.1,217.11 515.1,1277.89 627.11,1389.9 2225,1389.9 2226.95,1390.29 2228.6,1391.4 2243.6,1406.4 2244.71,1408.05 2245.1,1410 2245.1,2225 2244.71,2226.95 2243.6,2228.6 2198.6,2273.6 2196.95,2274.71 2195,2275.1 772.11,2275.1 765.1,2282.11 765.1,3047.89 787.11,3069.9 2245,3069.9 2246.95,3070.29 2248.6,3071.4 2407.11,3229.9 3352.89,3229.9
VCC on PWR03 (split plane): 3513.21,18.06 10.1,18.06 10.1,3521.18 3513.21,3521.18
DCBUS on PWR03 (split plane): 2487.87,2982.87 2489.96,2981.27 2490.67,2980.97 2492.39,2980.26 2495,2979.91 3260.82,2979.91 3267.87,2972.87 3269.96,2971.27 3271.68,2970.55 3272.39,2970.26 3275,2969.91 3430.82,2969.91 3459.91,2940.82 3459.91,2779.18 3400.82,2720.09 3314.25,2720.09 3311.64,2719.74 3309.21,2718.73 3307.12,2717.13 3297.87,2707.88 3296.26,2705.79 3295.26,2703.36 3294.91,2700.75 3294.91,2074.18 3280.82,2060.09 3239.18,2060.09 3190.09,2109.18 3190.09,2140 3189.74,2142.61 3188.73,2145.04 3187.13,2147.13 3170.09,2164.18 3170.09,2740 3169.74,2742.61 3168.73,2745.04 3167.13,2747.13 3152.13,2762.13 3150.04,2763.73 3147.61,2764.74 3145,2765.09 2430,2765.09 2427.39,2764.74 2424.96,2763.73 2422.87,2762.13 2407.87,2747.13 2406.26,2745.04 2405.26,2742.61 2404.91,2740 2404.91,2389.18 2335.82,2320.09 1550,2320.09 1547.39,2319.74 1546.17,2319.24 1544.96,2318.73 1542.87,2317.13 1465.82,2240.09 1204.18,2240.09 1182.13,2262.13 1180.04,2263.73 1177.61,2264.74 1175,2265.09 749.18,2265.09 702.13,2312.13 700.04,2313.73 697.61,2314.74 695,2315.09 565,2315.09 562.39,2314.74 561.68,2314.45 559.96,2313.73 557.87,2312.13 487.87,2242.13 486.26,2240.04 485.26,2237.61 484.91,2235 484.91,1405 485.26,1402.39 486.26,1399.96 487.87,1397.87 507.87,1377.87 509.96,1376.27 512.39,1375.26 515,1374.91 2250.82,1374.91 2349.91,1275.82 2349.91,585 2350.26,582.39 2351.26,579.96 2352.87,577.87 2482.87,447.87 2484.96,446.27 2485.67,445.97 2487.39,445.26 2490,444.91 2710.82,444.91 2799.91,355.82 2799.91,94.18 2795.82,90.09 1699.18,90.09 1527.13,262.13 1525.04,263.74 1522.61,264.74 1520,265.09 539.18,265.09 485.09,319.18 485.09,985 484.74,987.61 484.24,988.83 483.73,990.04 482.13,992.13 417.13,1057.13 415.04,1058.74 412.61,1059.74 410,1060.09 310.09,1060.09 310.09,1920.82 352.13,1962.87 353.73,1964.96 354.74,1967.39 355.09,1970 355.09,2340.82 404.18,2389.91 690,2389.91 692.61,2390.26 695.04,2391.27 697.13,2392.87 747.13,2442.87 748.73,2444.96 749.24,2446.17 749.74,2447.39 750.09,2450 750.09,3085.82 834.18,3169.91 2300.82,3169.91
+5 on PWR03 (split plane): 244.91,1830.82 244.91,1420 244.91,1043.89 245.26,1041.28 246.26,1038.85 247.87,1036.76 304.91,979.72 304.91,305 305.26,302.39 306.26,299.96 307.87,297.87 312.87,292.87 314.96,291.27 317.39,290.26 320,289.91 355.82,289.91 464.91,180.82 464.91,149.18 440.82,125.09 379.18,125.09 210.09,294.18 210.09,1115 209.74,1117.61 209.45,1118.32 208.73,1120.04 207.13,1122.13 170.09,1159.18 170.09,1740 169.74,1742.61 169.45,1743.32 168.73,1745.04 167.13,1747.13 145.09,1769.18 145.09,1835.82 149.18,1839.91 235,1839.91 235.73,1840.01

## Other copper
GND02 (plane layer: these items are gaps in the copper):
  lines w10: 510,215 680,45 2990,45 3010,65 3010,95 3090,175 3180,175 3330,325 3330,435 3310,455 2780,455 2650,325 2415,325 2335,405 2335,995 2385,1045 2385,2250 2410,2275 2410,2310 2410,3025 2450,3065 3350,3065 3370,3085 3370,3220 3355,3235 2405,3235 2245,3075 785,3075 760,3050 760,2280 770,2270 2195,2270 2240,2225 2240,1410 2225,1395 625,1395 510,1280 510,215
PWR03 (plane layer: these items are gaps in the copper):
  lines w20: 235,1850 145,1850 135,1840 135,1765 160,1740 160,1155 200,1115 200,290 375,115 445,115 475,145 475,185 360,300 320,300 315,305 315,983.89 255,1043.89 255,1420 255,1835 240,1850 ; 2195,3410 2215,3390 ; 300,1050 300,1925 345,1970 345,2345 400,2400 690,2400 740,2450 740,3090 830,3180 2305,3180 2495,2990 3265,2990 3275,2980 3335,2980 3435,2980 3470,2945 3470,2775 3405,2710 3314.25,2710 3305,2700.75 3305,2070 3285,2050 3235,2050 3180,2105 3180,2140 3160,2160 3160,2740 3145,2755 2430,2755 2415,2740 2415,2385 2340,2310 1550,2310 1470,2230 1200,2230 1175,2255 745,2255 695,2305 565,2305 495,2235 495,1405 515,1385 2255,1385 2360,1280 2360,585 2490,455 2715,455 2810,360 2810,90 2800,80 1695,80 1520,255 535,255 475,315 475,985 410,1050 300,1050

## Silkscreen, mask and mechanical layers (free items; w line width, h text height)
Mechanical 15:
  the board outline again, w10

## Text inside footprints (layer, text, board x,y; h text height)
SW1: Mechanical 6 "1" at 9447,3359.09 h20